# Altium PCB PCB1.PcbDoc
Units mil, origin at the board's own origin, x right, y up, seen from the top; angles counter-clockwise.
Board outline 2830.13 x 2330.03 mil, 2 copper layers (Top Layer, Bottom Layer); 108 components, 87 nets, 373 pads, 131 vias.
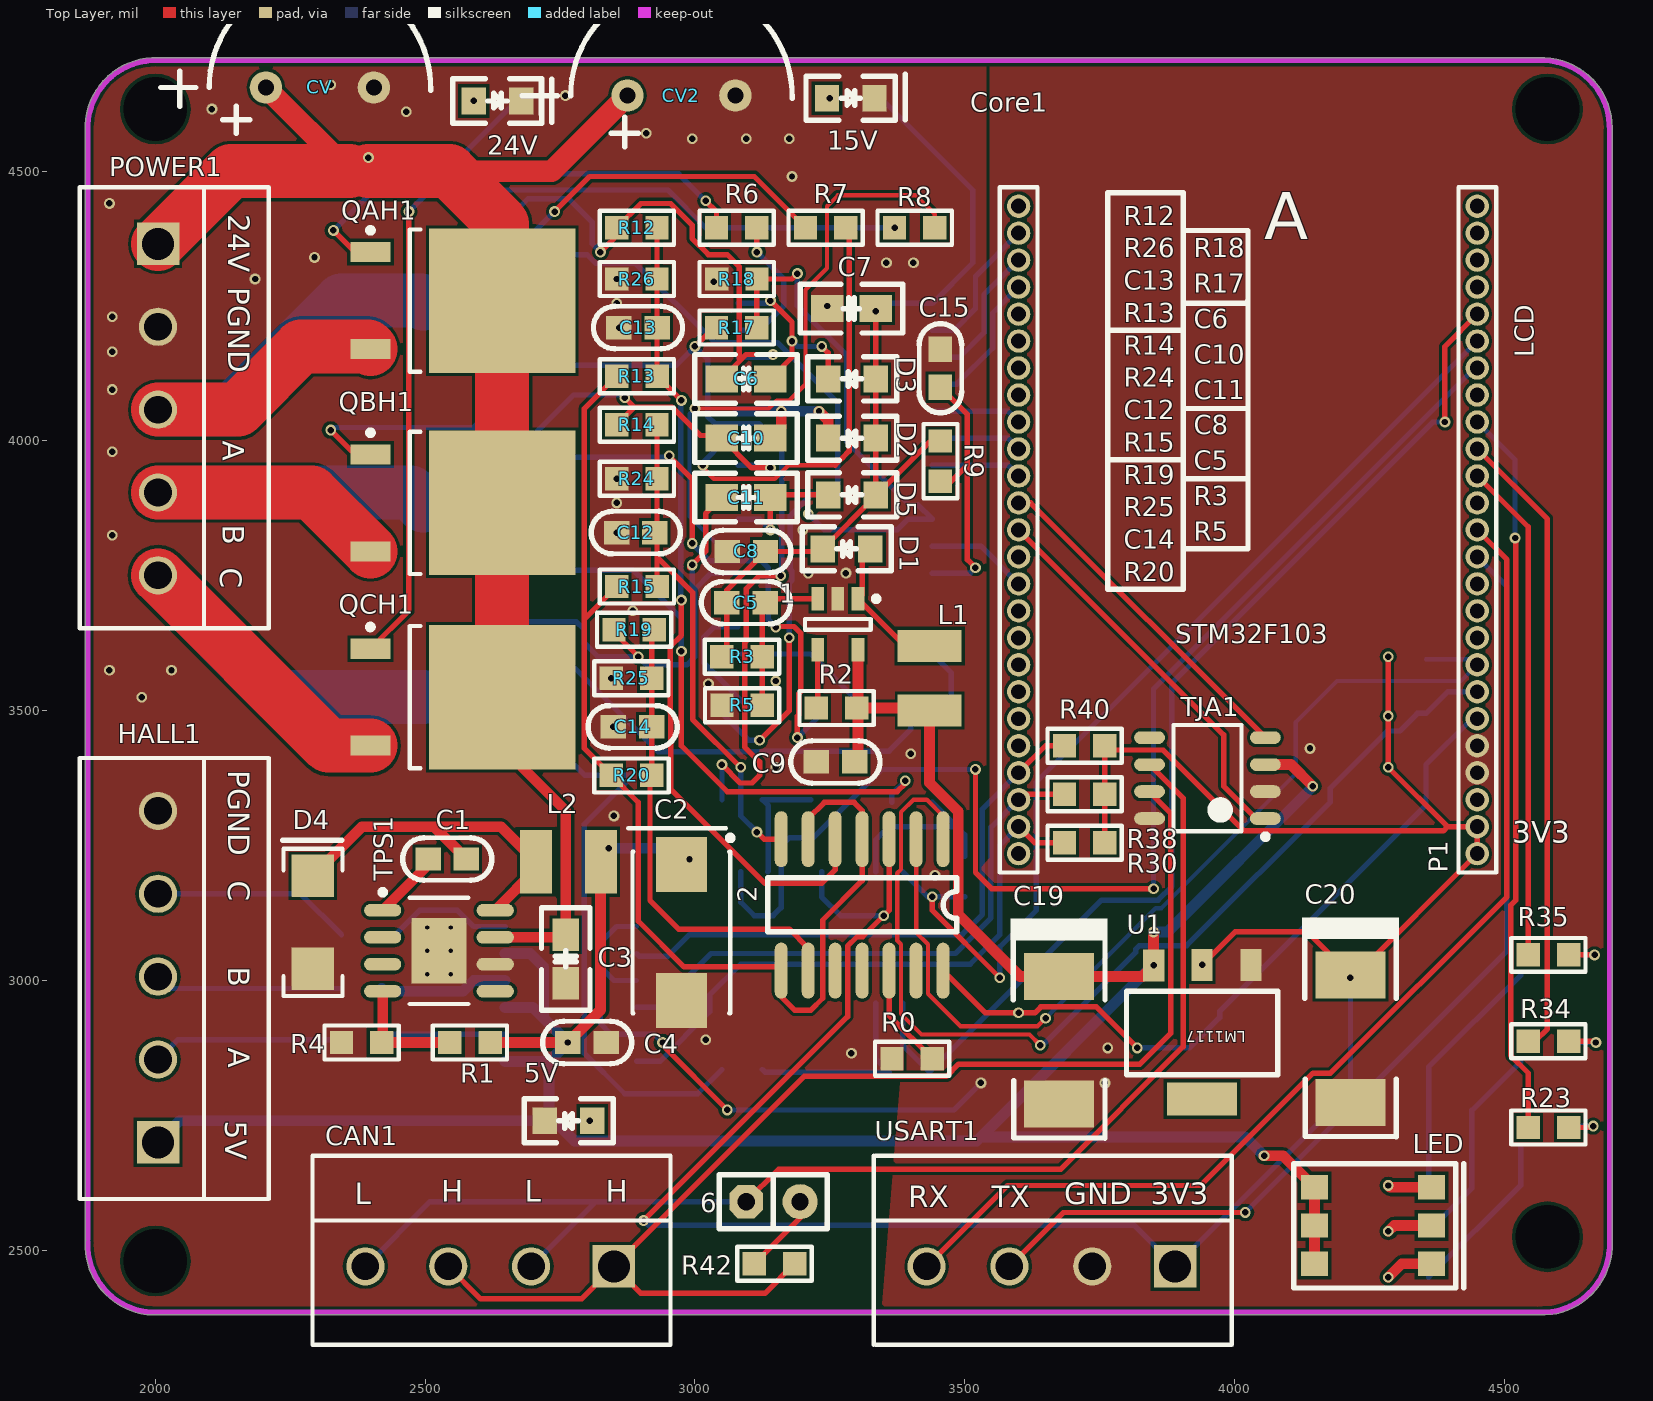
[diagram p0: Top Layer view]
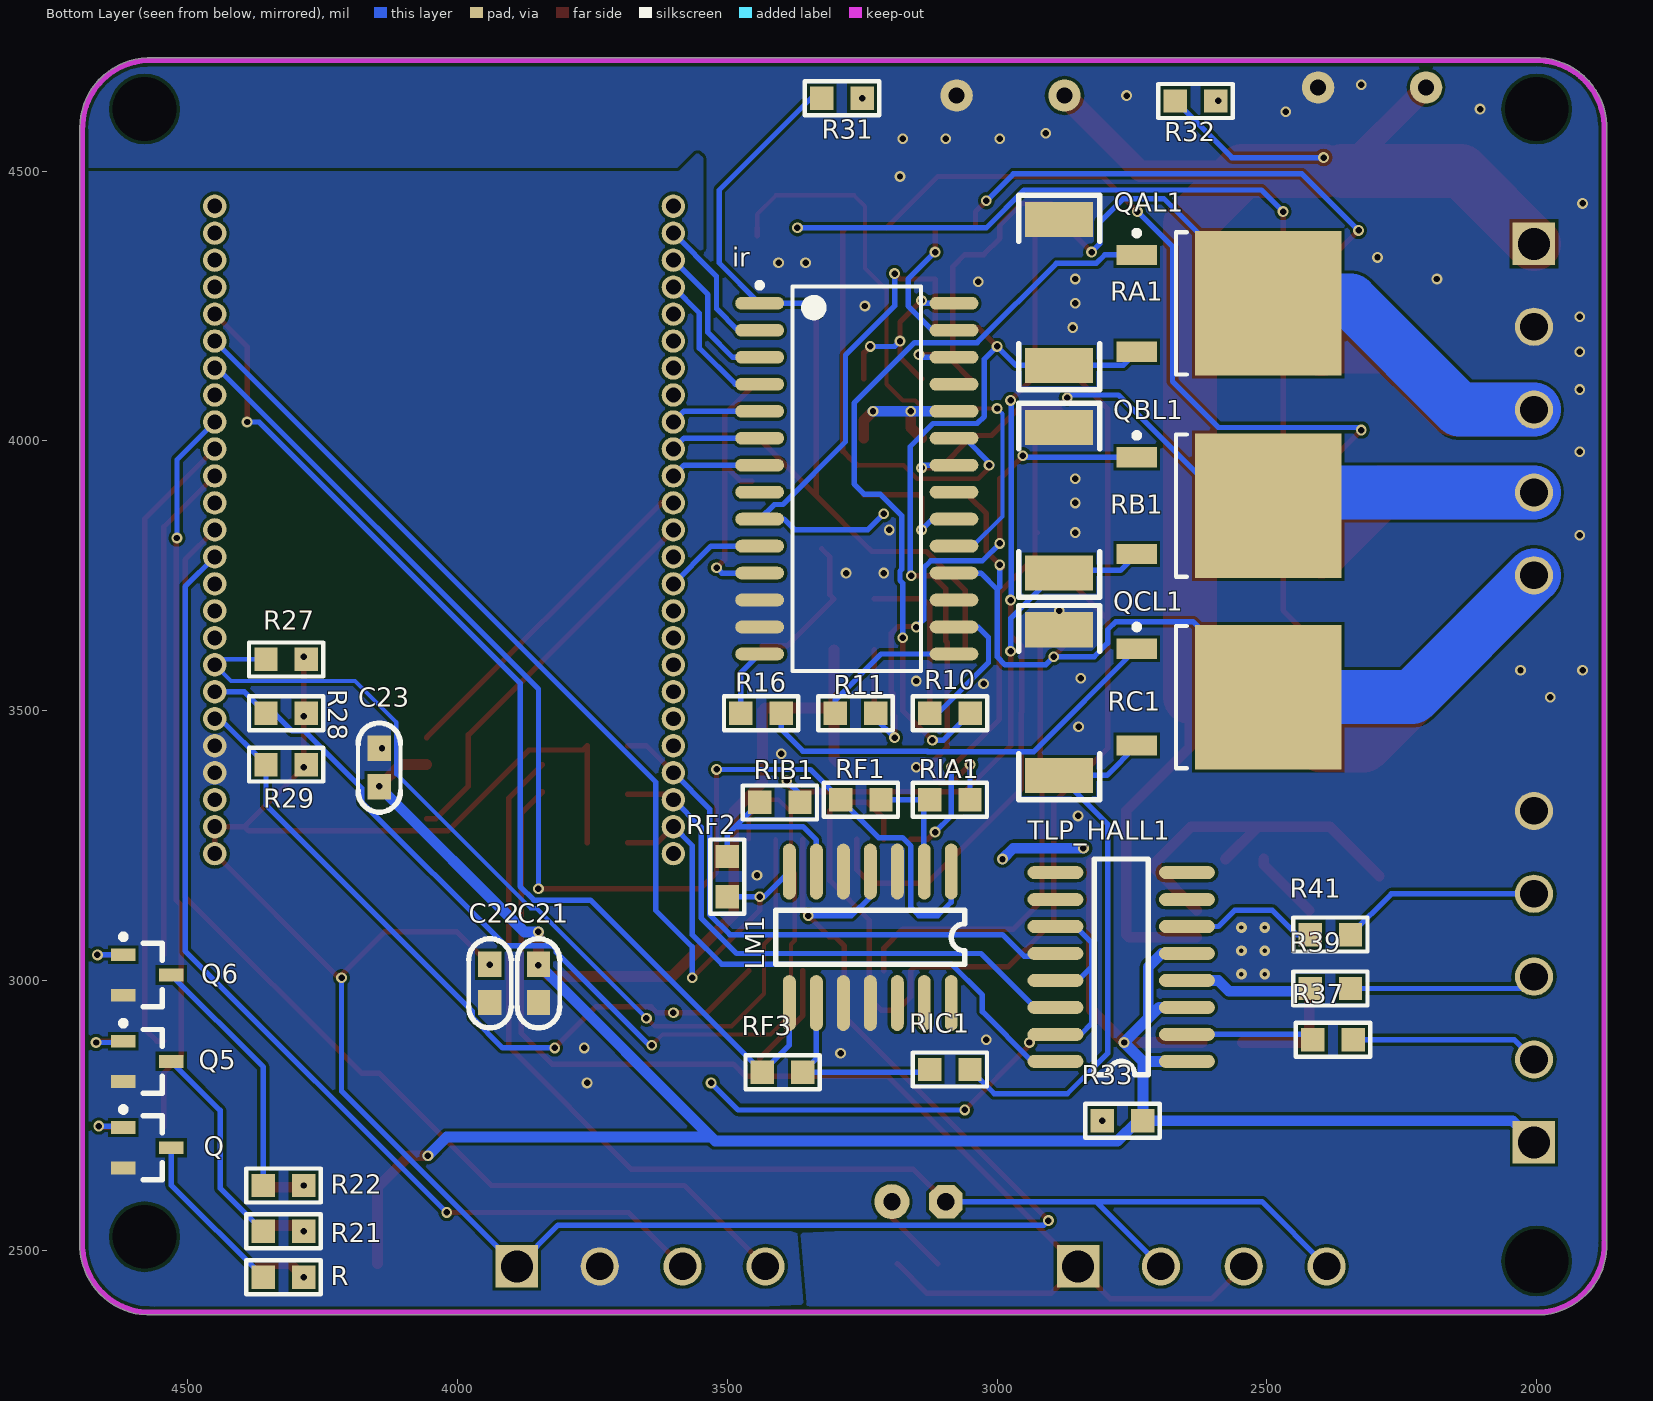
[diagram p1: Bottom Layer view, seen from below]

## Layer stack, top to bottom
Top Layer: signal copper 1.4
Dielectric: dielectric 12.6, FR-4, Dk 4.8
Bottom Layer: signal copper 1.4

## Board outline
1994.8,2379.99 cw(c2000,2510) 1869.99,2515.2 cw(c1875,2515) 1870.65,2517.5 cw(c1875,2520) 1869.98,2520 1869.98,4585 cw(c1875,4585) 1869.99,4585.2 cw(c2000,4580) 2005.1,4710.02 4575,4710.02 cw(c4575,4705) 4575.2,4710.01 cw(c4570,4580) 4700.11,4580 cw(c4570,4580) 4700.02,4574.9 4700.02,2505 cw(c4695,2505) 4700.01,2504.8 cw(c4570,2510) 4564.8,2379.99 cw(c4565,2385) 4562.5,2380.65 cw(c4560,2385) 4560,2379.99 1995,2379.99 cw(c1995,2385)

## Design rules (kind name [scope] priority, off if disabled: settings)
Clearance [All] p1: gap=6
PolygonConnect [All] p1: connectstyle=Direct reliefconductorwidth=10 reliefentries=4 polygonreliefangle="90 Angle" airgapwidth=10
RoutingVias [All] p1: holewidth=28 width=50 viastyle="Through Hole" minholewidth=28 minwidth=50 maxholewidth=28 maxwidth=50
SolderMaskExpansion [All] p1: expansion=4
Width [All] p1: maxlimit=100 minlimit=8 preferedwidth=10 minimp=50.000000 maximp=50.000000 favimp=50.000000
28 further rules are at their usual default settings.

## Components (designator, comment, footprint, x,y, rotation, side; value= is the part's Value field where it differs from the comment)
1 "LM27313" LM27313 3265,3660 r270 top
2 "LM339" SOP14 3460,3250 r270 top
5V "lED" 0805D 2810,2740 r180 top
6 "Header 2" SIP2 3195,2590 r180 top
15V "lED" 0805D 3245,4635 r0 top (schematic designator 12V)
24V "lED" 0805D 2590,4630 r0 top
C1 "Cap" CAP-MLCC-0603 2505.67,3225 r180 top
C2 "Cap Pol1" CAP-TAN-7343/CAPD 2975,3215 r270 top
C3 "Cap" 0805C 2760.67,3085 r270 top
C4 "Cap" CAP-MLCC-0603 2835.67,2885 r0 top
C5 "Cap" CAP-MLCC-0603 3130,3700 r0 top
C6 "Cap" 0805C 3050,4115 r0 top
C7 "Cap" 0805C 3245,4245 r0 top
C8 "Cap" CAP-MLCC-0603 3060,3795 r180 top
C9 "Cap" CAP-MLCC-0603 3225,3405 r180 top
C10 "Cap" 0805C 3050,4005 r0 top
C11 "Cap" 0805C 3050,3895 r0 top
C12 "Cap" CAP-MLCC-0603 2855,3830 r180 top
C13 "Cap" CAP-MLCC-0603 2930,4210 r0 top
C14 "Cap" CAP-MLCC-0603 2920,3470 r0 top
C15 "Cap" CAP-MLCC-0603 3455,4170 r90 top
C19 "Cap Pol" 6032C 3675,3007.28 r90 top
C20 "Cap Pol" 6032C 4215,3010 r90 top
C21 "Cap" CAP-MLCC-0603 3850,3030 r90 bottom
C22 "Cap" CAP-MLCC-0603 3940,3030 r90 bottom
C23 "Cap" CAP-MLCC-0603 4145,3430 r90 bottom
CAN1 "Header 4" Green_4P 2775,2375 r180 top
Core1 "STM32F103 SMALL" STM32F103Small 4050,3820 r90 top
CV "680uF" C_ELE 2205,4655 r0 top
CV2 "680uF" C_ELE 2875,4640 r0 top
D1 "1N5819" 0805D 3325,3800 r180 top
D2 "Diode" 0805D 3335,4005 r180 top
D3 "Diode" 0805D 3335,4115 r180 top
D4 "Diode" SS34 2295.67,3105 r270 top
D5 "Diode" 0805D 3335,3900 r180 top
HALL1 "Header 5" Green_5P#1 1910,2775 r90 top
ir "IR2136s" ir2136s 3260,3930 r180 bottom
L1 "Inductor" CD52 3435,3550 r180 top
L2 "Inductor" CD52 2755.67,3220 r90 top
LED "5050 LED" 5050LED 4365,2475 r90 top
LM1 "LM324" SOP14 3085,3190 r270 bottom
POWER1 "Header 5" Green_5P#2 1910,4290 r270 top
Q "8050" SOT-23B_N 4575,2690 r180 bottom
Q5 "8050" SOT-23B_N 4575,2850 r180 bottom
Q6 "8050" SOT-23B_N 4575,3010 r180 bottom
QAH1 "LR7843" LR7843 2570,4260 r0 top
QAL1 "LR7843" LR7843 2570,4255 r180 bottom
QBH1 "LR7843" LR7843 2570,3885 r0 top
QBL1 "LR7843" LR7843 2570,3880 r180 bottom
QCH1 "LR7843" LR7843 2570,3525 r0 top
QCL1 "LR7843" LR7843 2570,3525 r180 bottom
R "Res1" RES-0603 4360,2450 r0 bottom
R0 "Res1" RES-0603 3440,2855 r0 top
R1 "Res1" RES-0603 2545.67,2885 r180 top
R2 "Res1" RES-0603 3300,3505 r0 top
R3 "Res1" RES-0603 3050,3600 r180 top
R4 "Res1" RES-0603 2345,2885 r180 top
R5 "Res1" RES-0603 3125,3510 r0 top
R6 "Res1" RES-0603 3040,4395 r180 top
R7 "Res1" RES-0603 3205,4395 r180 top
R8 "Res1" RES-0603 3370,4395 r180 top
R9 "Res1" RES-0603 3455,3925 r270 top
R10 "Res1" RES-0603 3050,3495 r180 bottom
R11 "Res1" RES-0603 3225,3495 r180 bottom
R12 "Res1" RES-0603 2855,4395 r180 top
R13 "Res1" RES-0603 2930,4120 r0 top
R14 "Res1" RES-0603 2855,4030 r180 top
R15 "Res1" RES-0603 2930,3730 r0 top
R16 "Res1" RES-0603 3400,3495 r180 bottom
R17 "Res1" RES-0603 3040,4210 r180 top
R18 "Res1" RES-0603 3115,4300 r0 top
R19 "Res1" RES-0603 2850,3650 r180 top
R20 "Res1" RES-0603 2920,3380 r0 top
R21 "Res1" RES-0603 4360,2535 r0 bottom
R22 "Res1" RES-0603 4360,2620 r0 bottom
R23 "Res1" RES-0603 4619.29,2727.4 r0 top
R24 "Res1" RES-0603 2855,3930 r180 top
R25 "Res1" RES-0603 2845,3560 r180 top
R26 "Res1" RES-0603 2855,4300 r180 top
R27 "Res1" RES-0603 4355,3595 r0 bottom
R28 "Res1" RES-0603 4355,3495 r0 bottom
R29 "Res1" RES-0603 4355,3400 r0 bottom
R30 "Res1" RES-0603 3685,3255 r180 top
R31 "Res1" RES-0603 3250,4635 r180 bottom
R32 "Res1" RES-0603 2595,4630 r180 bottom
R33 "Res1" RES-0603 2805,2740 r0 bottom
R34 "Res1" RES-0603 4619.29,2887.4 r0 top
R35 "Res1" RES-0603 4619.29,3047.4 r0 top
R37 "Res1" RES-0603 2340,2890 r180 bottom
R38 "Res1" RES-0603 3685,3345 r180 top
R39 "Res1" RES-0603 2345,2985 r180 bottom
R40 "Res1" RES-0603 3685,3435 r180 top
R41 "Res1" RES-0603 2345,3085 r180 bottom
R42 "Res1" RES-0603 3185,2475 r0 top
RA1 "Res1" 2512R 2890,4360 r270 bottom
RB1 "Res1" 2512R 2890,3975 r270 bottom
RC1 "Res1" 2512R 2890,3600 r270 bottom
RF1 "Res1" RES-0603 3290,3335 r0 bottom
RF2 "Res1" RES-0603 3500,3155 r270 bottom
RF3 "Res1" RES-0603 3435,2830 r0 bottom
RIA1 "Res1" RES-0603 3125,3335 r0 bottom
RIB1 "Res1" RES-0603 3440,3330 r0 bottom
RIC1 "Res1" RES-0603 3125,2835 r0 bottom
TJA1 "TJA1050" TJA1050 3950,3375 r180 top
TLP_HALL1 "TLP281-4" SOP16 2660,2850 r0 bottom
TPS1 "TPS5430" TPS5430 2525.67,3055 r0 top
U1 "tlv1117-3.3" LM1117 3950,2905 r180 top
USART1 "Header 4" Green_4P 3815,2375 r180 top

## Footprints (in the part's own frame and the unit in brackets; to place one, negate y for a bottom-side part, rotate by r counter-clockwise, add the part's x,y. Pads: shape width x height; smd on the part's side, far side on the other; paste and mask are expansions set on the pad)
0805C [mil]
  rect 60x50 smd: 1(0,0) 2(90,0)
  silkscreen extent -50,-45 140,45
0805D [mil]
  rect 45x50 smd: A(0,0) K(88,0)
  silkscreen extent -39,-41 126,41
2512R [mm]
  rect 1.65x3.2 smd: 1(-1.27,0.127) 2(5.588,0.127)
  silkscreen extent -2.41,-1.78 6.73,2.03
5050LED [mm]
  rect 1.143x1.27 smd: A1(0,5.5) A2(1.8,5.5) A3(3.6,5.5) K1(0,0) K2(1.8,0) K3(3.6,0)
  silkscreen extent -1.14,-1.52 4.7,6.48
6032C [mm]
  rect 2.2x3.3 smd: 1(0,0) 2(-6,0)
  silkscreen extent -7.6,-2.29 2.72,2.28
C_ELE [mil]
  round 60 hole 30: 1(0,0) 2(200,0)
  silkscreen extent -195,-35 305,205
CAP-MLCC-0603 [mm]
  rect 1.2x1.1 smd: 1(0,0) 2(-1.8,0)
  silkscreen extent -3,-1 1.2,1, body extent -1.77,-0.47 -0.02,0.48, height 0.85
CAP-TAN-7343/CAPD [mm]
  rect 2.6x2.4 smd: 1(0,0) 2(6.4,0)
  silkscreen extent -1.7,-2.5 7,2.43
CD52 [mm]
  rect 3x1.5 smd: 1(0,1.27) 2(0,-1.778)
Green_4P [mm]
  rect 2x2 hole 1.5: 1(-1.905,-2.413)
  round 1.8 hole 1.3: 2(1.995,-2.413) 3(5.895,-2.413) 4(9.795,-2.413)
  silkscreen extent -4.57,-7.62 12.28,1.27
Green_5P#1 [mm]
  rect 2x2 hole 1.5: 1(-1.905,-2.413)
  round 1.8 hole 1.3: 2(1.995,-2.413) 3(5.895,-2.413) 4(9.795,-2.413) 5(13.695,-2.413)
  silkscreen extent -4.57,-7.62 16.18,1.27
Green_5P#2 [mm]
  rect 2x2 hole 1.5: 1(-1.905,2.413)
  round 1.8 hole 1.3: 2(1.995,2.413) 3(5.895,2.413) 4(9.795,2.413) 5(13.695,2.413)
  silkscreen extent -4.57,-1.27 16.18,7.62
ir2136s [mm]
  oval 2.3x0.6 smd: 1(-4.575,8.255) 2(-4.575,6.985) 3(-4.575,5.715) 4(-4.575,4.445) 5(-4.575,3.175) 6(-4.575,1.905) 7(-4.575,0.635) 8(-4.575,-0.635) 9(-4.575,-1.905) 10(-4.575,-3.175) 11(-4.575,-4.445) 12(-4.575,-5.715) 13(-4.575,-6.985) 14(-4.575,-8.255) 15(4.575,-8.255) 16(4.575,-6.985) 17(4.575,-5.715) 18(4.575,-4.445) 19(4.575,-3.175) 20(4.575,-1.905) 21(4.575,-0.635) 22(4.575,0.635) 23(4.575,1.905) 24(4.575,3.175) 25(4.575,4.445) 26(4.575,5.715) 27(4.575,6.985) 28(4.575,8.255)
  silkscreen extent -4.7,-9.05 3.03,9.23, body extent -3.8,-9.05 3.8,9.05, height 1.7
LM1117 [mm]
  rect 1x1.5 smd: 1(-2.043,-3.148) 2(0.256,-3.148) 3(2.53,-3.123)
  rect 3.3x1.549 smd: 4(0.254,3.175)
  silkscreen extent -3.3,-1.91 3.81,2.03
LM27313 [mm] "SOT23, 5-Leads, Body 2.90x2.80mm, Pitch 0.95mm, IPC Medium Density"
  rect 1.1x0.6 smd: 1(-1.2,0.95) 2(-1.2,0) 3(-1.2,-0.95) 4(1.2,-0.95) 5(1.2,0.95)
  silkscreen extent -1.32,-1.55 0.25,1.93, body extent -0.87,-1.52 0.87,1.53, height 1.45
LR7843 [mm] "D-PAK, 3-Pads, Body 6.20x6.72mm (max), IPC Medium Density"
  rect 6.9x6.8 smd: D(1.85,0)
  rect 1.9x0.95 smd: G(-4.35,2.28) S(-4.35,-2.28)
  silkscreen extent -4.47,-3.35 -2,3.43, body extent -2.5,-3.35 3.7,3.35, height 2.38
RES-0603 [mm]
  rect 1.1x1.1 smd: 1(0,0) 2(-1.9,0)
  silkscreen extent -2.7,-0.8 0.8,0.8, body extent -1.8,-0.47 -0.1,0.48, height 0.6
SIP2 [mil]
  round 65 hole 32: 1(0,0)
  oct 62x62 hole 32: 2(100,0)
  silkscreen extent -50,-50 150,50
SOP14 [mil]
  oval 103.62x24 smd: 1(-11.81,0) 2(-11.81,-50) 3(-11.81,-100) 4(-11.81,-150) 5(-11.81,-200) 6(-11.81,-250) 7(-11.81,-300) 8(231.81,-300) 9(231.81,-250) 10(231.81,-200) 11(231.81,-150) 12(231.81,-100) 13(231.81,-50) 14(231.81,0)
  silkscreen extent 60,-325 160,25
SOP16 [mil]
  oval 103.62x24 smd: 1(-11.81,0) 2(-11.81,-50) 3(-11.81,-100) 4(-11.81,-150) 5(-11.81,-200) 6(-11.81,-250) 7(-11.81,-300) 8(-11.81,-350) 9(231.81,-350) 10(231.81,-300) 11(231.81,-250) 12(231.81,-200) 13(231.81,-150) 14(231.81,-100) 15(231.81,-50) 16(231.81,0)
  silkscreen extent 60,-375 160,25
SOT-23B_N [mm] "SOT23, 3-Leads, Body 2.9x1.3mm, Pitch 0.95mm, Lead Span 2.4mm, IPC Medium Density"
  rect 1.15x0.6 smd: 1(-1.125,0.95) 2(-1.125,-0.95) 3(1.125,0)
  silkscreen extent -1.25,-1.5 0.7,1.92, body extent -0.7,-1.5 0.7,1.5, height 1.14
SS34 [mm]
  rect 2x2 smd: A(2.125,-0.102) K(-2.25,-0.102)
  silkscreen extent -3.94,-1.52 3.4,1.3, body extent -2.48,-1.48 2.37,1.3, height 1.4
STM32F103Small [mm]
  round 1.1 hole 0.7: 1(-14.859,-10.16) 2(-13.589,-10.16) 3(-12.319,-10.16) 4(-11.049,-10.16) 5(-9.779,-10.16) 6(-8.509,-10.16) 7(-7.239,-10.16) 8(-5.969,-10.16) 9(-4.699,-10.16) 10(-3.429,-10.16) 11(-2.159,-10.16) 12(-0.889,-10.16) 13(0.381,-10.16) 14(1.651,-10.16) 15(2.921,-10.16) 16(4.191,-10.16) 17(5.461,-10.16) 18(6.731,-10.16) 19(8.001,-10.16) 20(9.271,-10.16) 21(10.541,-10.16) 22(11.811,-10.16) 23(13.081,-10.16) 24(14.351,-10.16) 25(15.621,-10.16) 26(-14.859,11.43) 27(-13.589,11.43) 28(-12.319,11.43) 29(-11.049,11.43) 30(-9.779,11.43) 31(-8.509,11.43) 32(-7.239,11.43) 33(-5.969,11.43) 34(-4.699,11.43) 35(-3.429,11.43) 36(-2.159,11.43) 37(-0.889,11.43) 38(0.381,11.43) 39(1.651,11.43) 40(2.921,11.43) 41(4.191,11.43) 42(5.461,11.43) 43(6.731,11.43) 44(8.001,11.43) 45(9.271,11.43) 46(10.541,11.43) 47(11.811,11.43) 48(13.081,11.43) 49(14.351,11.43) 50(15.621,11.43)
  silkscreen extent -15.75,-11.05 16.51,12.32
TJA1050 [mm] "SOIC, 8-Leads, Body 4.90x3.90mm, Pitch 1.27mm, IPC Medium Density"
  oval 1.45x0.6 smd: 1(-2.725,1.905) 2(-2.725,0.635) 3(-2.725,-0.635) 4(-2.725,-1.905) 5(2.725,-1.905) 6(2.725,-0.635) 7(2.725,0.635) 8(2.725,1.905)
  silkscreen extent -2.85,-2.5 1.6,2.88, body extent -2,-2.5 2,2.5, height 1.75
TPS5430 [mm]
  oval 1.75x0.6 smd: 1(-2.65,1.905) 2(-2.65,0.635) 3(-2.65,-0.635) 4(-2.65,-1.905) 5(2.65,-1.905) 6(2.65,-0.635) 7(2.65,0.635) 8(2.65,1.905)
  rect 2.6x3.1 smd: 9(0,0)
  silkscreen extent -2.77,-2.5 1.38,2.88, body extent -2,-2.5 2,2.5, height 1.7

## Part data
5V 15V 24V: library part 00-D-LED, "LED"
6: "Header, 2-Pin"
C1 C3 C4 C6 C7 C10 C11 C12 C13 C14 C15 C21 C22 C23: "Capacitor"
C2 C19 C20: "Polarized Capacitor (Radial)"
C5 C8 C9: library part Cap_1, "Capacitor"
CAN1 USART1: "Header, 4-Pin"
CV CV2: library part CAP-ELE, "电解电容"
D1: library part D-MBRA140T3, "MBRA140T3"
HALL1 POWER1: "Header, 5-Pin"
Q Q5 Q6: library part QNPN, "NPN Bipolar Transistor"
R R0 R1 R4 R6 R7 R8 R9 R10 R11 R12 R13 R14 R15 R16 R17 R18 R19 R20 R21 R22 R23 R24 R25 R26 R27 R28 R29 R30 R31 R32 R33 R34 R35 R37 R38 R39 R40 R41 R42 RA1 RB1 RC1 RF1 RF2 RF3 RIA1 RIB1 RIC1: "Resistor"
R2 R3 R5: library part Res1_1, "Resistor"
TJA1: "CAN总线收发器"
TLP_HALL1: library part IC-TLP281-4
U1: library part LM1117IMP-5.0, "800mA Low-Dropout Linear Regulator"

## Free pads (board coordinates)
  round 30 hole 118.11: 0(2000,2480) 0(2000,4615) 0(4580,2525) 0(4580,4615)

## Via types
v1: diameter 20, hole 12, Top Layer to Bottom Layer, 125 vias
v2: diameter 20, hole 7.87, Top Layer to Bottom Layer, 6 vias

## Nets (pads, with @x,y where several pads share a name; then routed paths per layer and width w, separated by ;. In a path a pad name is that pad's centre, name@x,y a point inside that pad or via, vN(x,y) a via of type N, cw(c..) or ccw(c..) an arc to the next point about the centre after c; other vN are vias at no path point)
3.3V: 2.3 C20.1 C22.1 Core1.1 Core1.2 LM1.4 R27.2 R28.2 R29.2 R30.2 R38.2 R40.2 U1.2 USART1.1 | length 4778.6
  Top Layer w10: v1(2905,2555) 3283,2933 3283,3063.53 3300.47,3081 3311,3081 v1(3350,3120) 3360,3130 2.3 ; R30.2 R38.2 R40.2 3767.61,3427.19 3867.81,3427.19 4017.81,3277.19 4387.19,3277.19 4395,3285 ; v1(3939.92,3028.95) 4000.97,3090 4135,3090 C20.1 4225,3010 Core1.1 Core1.2 4395,3285 ; v1(4285,3600) v1(4285,3395) 4395,3285
  Bottom Layer w10: v1(2905,2555) 2913.5,2546.5 3813.5,2546.5 USART1.1 4215,2795 v1(4215,3005) ; LM1.4 3235,3155 3270,3120 v1(3350,3120)
  other v1: 4285,3490
5V: 1.5 C2.1 C4.2 C9.2 C19.1 C21.1 C23.2 HALL1.1 L1.1 L2.2 LED.A1 LED.A2 LED.A3 R1.2 R2.1 R33.2 TJA1.3 TLP_HALL1.1 TLP_HALL1.3 TLP_HALL1.5 U1.3 | length 5774.2
  Top Layer w20: R1.2 v1(2764.8,2885) 2765,2885 2825,2945 2825,3219.33 L2.2 ; C9.2 3302.4,3411.54 R2.1@3302.4,3505 ; R2.1 R2.1@3302.4,3505 ; 1.5 R2.1@3302.4,3505 ; v1(3850,3090) 3850,3028.34 v1(3850.38,3027.97) 3829.68,3007.28 C19.1 3602.72,3007.28 3488,3122 3488,3313.22 3435,3366.22 L1.1 3430,3505 R2.1@3302.4,3505 ; v1(4055,2675) 4090.2,2675 LED.A3 LED.A2 LED.A1 ; TJA1.3 4105,3400 v1(4145,3360)
  Bottom Layer w20: HALL1.1 2045,2740 R33.2 ; TLP_HALL1.1 2729.8,2850 ; TLP_HALL1.3 2699.8,2950 2717.4,2932.4 ; TLP_HALL1.5 2695,3050 2720,3025 2720,2935 2717.4,2932.4 ; v1(2840,3245) 2970,3245 v1(2990,3225) ; C21.1 3530,2710 ; v1(3850,3090) 3875.87,3090 C23.2 ; v1(4055,2675) 4020,2710 3530,2710 ; 2717.4,2932.4 v1(2764.8,2885) 2729.8,2850 ; 2729.8,2850 2729.8,2740.39 R33.2 ; R33.2 2739.07,2740 2776.72,2702.35 3522.35,2702.35 3530,2710
15V: C5.2 C7.2 C8.2 D1.K D2.A D3.A D5.A ir.1 R3.1 R9.2 R31.2 | length 1597.4
  Top Layer w10: R3.1 3059.13,3609.13 C5.2 3059.13,3723.27 C8.2 3232,3795 D1.K D5.A@3335,3898 ; C7.2 D3.A D2.A D5.A D5.A@3335,3898 ; R9.2 3436.8,3999.8 D5.A@3335,3898
  Bottom Layer w10: R31.2 3345,4635 3515,4465 3515,4329.88 ir.1 3350,4255 v1(3335,4240)
24V: C3.1 CV2.1 CV.1 POWER1.1 QAH1.D QBH1.D QCH1.D R32.2 TPS1.7 | length 3163.7
  Top Layer w20: TPS1.7 2755.67,3080 C3.1 2760.67,3314.33 2642.83,3432.17 QCH1.D
  Top Layer w40: CV.1 2360,4500 2395,4500 ; 2545,4500 2735,4500 CV2.1
  Top Layer w100: POWER1.1 2140,4500 2360,4500 ; 2395,4500 2545,4500 2642.83,4402.17 QAH1.D QBH1.D QCH1.D
  Bottom Layer w10: v1(2395,4525) 2564.8,4525 R32.2 R32.2@2669.8,4624.8
AH: ir.27 R6.2 | length 269.5
  Top Layer w10: R6.2 3115,4394.8 v1(3115,4350)
  Bottom Layer w10: ir.27 3120,4205 3165,4250 3165,4300 v1(3115,4350)
AHIN: Core1.49 ir.2 | length 269.6
  Bottom Layer w10: ir.2 3480,4205 3520,4245 3520,4305 Core1.49
AL: ir.16 R10.2 | length 266.5
  Bottom Layer w10: ir.16 3035,3655 3016,3636 3016,3589 3110,3495 R10.2
ALIN: Core1.42 ir.5 | length 168.2
  Bottom Layer w10: ir.5 3580,4055 Core1.42
BH: ir.23 R7.2 | length 824.7
  Top Layer w8: v1(3015,3955) 3010,3955 3035,3930 3148.28,3930 3173.28,3955 3260,3955
  Top Layer w10: 3260,3955 3274,3969 3274.06,3969 3286,3980.94 3286,4388.8 R7.2
  Bottom Layer w10: v1(3015,3955) 3010,3955 3060,4005 ir.23
BHIN: Core1.48 ir.3 | length 275.4
  Bottom Layer w10: ir.3 3490,4155 3536,4201 3536,4271 Core1.48
BL: ir.15 R11.2 | length 280.2
  Bottom Layer w10: ir.15 3215,3605 3299.8,3520.2 R11.2
BLDCA: C6.1 ir.26 POWER1.3 QAH1.S QAL1.D R12.1 | length 2216
  Top Layer w10: v1(2825,4350) 2855,4380 R12.1 2900,4440 2955,4440 2995,4400 2995,4375 3025,4345 3060,4345 3082.15,4322.85 3082.15,4152.85 3085,4150 ; C6.1 3085,4150 ; v1(3145,4160) 3095,4160 3085,4150
  Top Layer w100: POWER1.3 2152.91,4057.91 2270,4175 2393.98,4175 QAH1.S
  Bottom Layer w10: QAL1.D 2691.17,4449 2766,4449 2810,4405 2810,4365 v1(2825,4350) ; ir.26 3140,4155 v1(3145,4160)
  Bottom Layer w100: POWER1.3 2142.91,4057.91 2345,4260 2492.17,4260 QAL1.D
BLDCB: C10.1 ir.22 POWER1.4 QBH1.S QBL1.D R14.1 | length 1833.2
  Top Layer w10: R14.1 2887.65,4062.65 ; v1(2870,4080) 2887.35,4062.65 2887.65,4062.65 ; v1(3140,3950) 3105,3950 C10.1 3045,4010 3010,4010 2957.35,4062.65 2887.65,4062.65
  Top Layer w100: POWER1.4 2289.61,3904.37 QBH1.S
  Bottom Layer w10: QBL1.D 2570,3880 2775,4085 2865,4085 v1(2870,4080) ; ir.22 3135,3955 v1(3140,3950)
  Bottom Layer w100: POWER1.4 2472.8,3904.37 QBL1.D
BLDCC: C11.1 ir.18 POWER1.5 QCH1.S QCL1.D R19.1 | length 2219.9
  Top Layer w10: R19.1@2845,3650 v1(2895,3600) v1@2900,3600 ; v1@2990,3765 v1(2995,3770) 3020,3795 3020,3865 C11.1
  Top Layer w100: POWER1.5 2320.59,3435.24 QCH1.S
  Bottom Layer w10: QCL1.D 2637.17,3665 2780,3665 2795,3650 2795,3625 2820,3600 v1(2895,3600) 2910,3585 2985,3585 3000,3600 3000,3725 ; v1(2995,3770) 2995,3730 3000,3725 ; ir.18 3030,3755 3000,3725
  Bottom Layer w100: POWER1.5 2230.83,3525 QCL1.D
BLIN: Core1.41 ir.6 | length 168.2
  Bottom Layer w10: ir.6 3580,4005 Core1.41
CAN_H: CAN1.1 CAN1.3 R42.1 TJA1.7 | length 2410.7
  Top Layer w10: CAN1.3 2602.91,2410 2790,2410 CAN1.1 ; R42.1 3130,2420 2900,2420 CAN1.1 ; TJA1.7 3842.72,3348.99 3882.26,3309.45 3882.26,2902.26 3825,2845 3488.86,2845 3466.21,2822.35 3202.35,2822.35 CAN1.1
CAN_L: 6.2 CAN1.2 CAN1.4 TJA1.6 | length 2402.6
  Top Layer w10: 6.2 3155,2650 3677.77,2650 3905,2877.23 3905,3337.72 TJA1.6
  Bottom Layer w10: CAN1.4 2509.37,2590 2816.46,2590 ; CAN1.2 2816.46,2590 ; 6.2 2816.46,2590
CAN_RX: Core1.39 TJA1.4 | length 637.5
  Top Layer w10: Core1.39 3622.28,3885 TJA1.4
CAN_TX: Core1.38 TJA1.1 | length 734.5
  Top Layer w10: Core1.38 3980,3455 3980,3360 4040,3300 TJA1.1
CH: ir.19 R8.2 | length 1149.9
  Top Layer w8: v1(3000,4060) 3136.72,4060 3151.72,4075 3175,4075 3205,4105 3205,4280 3245,4320 3245,4435 3265,4455 3410,4455 3444.8,4420.2 R8.2
  Top Layer w10: R8.2@3444.8,4379.8 R8.2
  Bottom Layer w8: v1(3000,4060) 2990,4050 2990,3860 3045,3805 ir.19
CHANGEA: 2.2 Core1.8 R27.1 | length 1771.5
  Top Layer w8: 2.2 3410,3089.11 3432,3067.11 3432,2975.27 3492.27,2915 3635,2915 v1(3650,2930)
  Bottom Layer w8: v1(3650,2930) 3854,3134 3864.91,3134 4113.35,3382.43 4113.35,3478.35 4190,3555 4420,3555 Core1.8 4440,3595 R27.1
CHANGEB: 2.1 Core1.7 R28.1 | length 1899.6
  Top Layer w8: 2.1 3460,3305 3430,3335 3405,3335 3382,3312 3382,3205.89 3375,3198.89 3375,3074.11 3382,3067.11 3382,2938 3420,2900 3620,2900 v1(3640,2880)
  Bottom Layer w10: v1@3645,2880 3817.35,3052.35 3817.35,3058.18 3823.79,3064.62 3911.32,3064.62 4177.65,3330.96 4177.65,3356.32 4283.68,3462.35 4306.41,3462.35 4339.06,3495 R28.1 4395,3535 Core1.7
CHANGEC: 2.14 Core1.6 R29.1 | length 1361.9
  Top Layer w10: 2.14 3538.19,2940 v1(3600,2940) 3630.3,2940 3641.3,2951 3744,2951 v1(3820,2875)
  Bottom Layer w10: v1(3820,2875) 3916.7,2875 3972.65,2930.96 3972.65,2942.65 4355,3325 R29.1 4440,3485 Core1.6
CHIN: Core1.47 ir.4 | length 272.5
  Bottom Layer w10: ir.4 3485,4105 3552,4172 3552,4237 Core1.47
CL: ir.14 R16.2 | length 124.4
  Bottom Layer w10: ir.14 3474.8,3570.32 R16.2
CLIN: Core1.40 ir.7 | length 168.2
  Bottom Layer w10: ir.7 3580,3955 Core1.40
EN: Core1.36 ir.10 | length 188.9
  Bottom Layer w10: ir.10 3530,3805 Core1.36
FAULT: ir.8
GND: 2.12 C19.2 C20.2 C21.2 C22.2 C23.1 Core1.4 Core1.5 Q5.2 Q6.2 Q.2 R0.1 TJA1.2 TJA1.8 TLP_HALL1.11 TLP_HALL1.13 TLP_HALL1.15 U1.1 USART1.2 | length 1297.6
  Top Layer w10: v1(2940,2885) 2940,2880 v1(3060,2760) ; 2.12 3360,2935 R0.1
  Bottom Layer w10: TLP_HALL1.13 2850,3000 2825,3025 ; TLP_HALL1.11 2855,3100 2825,3070 2825,3025 ; v1(2940,2885) 2925,2900 TLP_HALL1.15 2845,2900 2825,2920 2825,3025 ; v1(3060,2760) 3480,2760 v1(3530,2810)
  other v1: 3760,2810 3765,2875 4140,3430
H_A: HALL1.2 R37.1 | length 350.1
  Bottom Layer w10: HALL1.2 2041.46,2890 R37.1
H_B: HALL1.3 R39.1 | length 349.1
  Bottom Layer w10: HALL1.3 2027.09,2985 R39.1
H_C: HALL1.4 R41.1 | length 371.3
  Bottom Layer w10: HALL1.4 2269.37,3160.63 R41.1
HALL_A: Core1.27 R30.1 TLP_HALL1.16 | length 1100.3
  Top Layer w10: Core1.27 3630,3255 R30.1
  Bottom Layer w10: TLP_HALL1.16 2935,2850 3027.24,2942.24 3027.24,2972.76 3084.47,3030 3510,3030 3564.65,3084.65 3564.65,3249.65 Core1.27
HALL_B: Core1.28 R38.1 TLP_HALL1.14 | length 1055.2
  Top Layer w10: Core1.28 3610,3345 R38.1
  Bottom Layer w10: TLP_HALL1.14 2930,2950 3030,3050 3482.93,3050 3548.65,3115.72 3548.65,3283.65 Core1.28
HALL_C: Core1.29 R40.1 TLP_HALL1.12 | length 1071.2
  Top Layer w10: Core1.29 3650,3435 R40.1
  Bottom Layer w10: TLP_HALL1.12 2896.81,3045 2950,3045 2990,3085 3495.31,3085 3532.65,3122.35 3532.65,3317.65 Core1.29
IA: QAL1.S R17.1 RA1.2 RIA1.2 | length 1465.9
  Top Layer w10: v1(3000,4175) 3035,4210 R17.1 ; v1(3050,3400) 3084,3366 3106,3366 3120,3380 3120,3405 3092.15,3432.85 3092.15,3626.21 3095.38,3629.44 3095.38,3726.21 3119.17,3750 v1(3159,3750)
  Bottom Layer w10: QAL1.S 2766.5,4140 RA1.2 2965,4140 v1(3000,4175) 3023.61,4151.39 3023.61,4045.55 3036.97,4032.19 3118.42,4032.19 3161,3989.61 3161,3752 v1(3159,3750) ; v1(3050,3400) 3050.2,3399.8 RIA1.2
IA2: Core1.19 LM1.1 RF1.1 | length 2433.2
  Top Layer w10: v1(3520,3391) 3520,3200 3550,3170 v1(3850,3170)
  Bottom Layer w10: LM1.1 3085,3145 3110,3120 3145,3120 3160,3135 3160,3249.15 3175.47,3264.62 3219.62,3264.62 RF1.1 3346,3391 v1(3520,3391) ; v1(3850,3170) 3850,3540 Core1.19@4450,4140
IB: QBL1.S RB1.2 RIB1.2 | length 1030.8
  Top Layer w10: v1(2975,3610) 2975,3435 3060,3350 3375,3350 3390,3365 v1(3390,3370)
  Bottom Layer w10: QBL1.S 2771.5,3760 2886.03,3760 2975,3671.03 v1(2975,3610) ; RIB1.2 3365.2,3345.2 v1(3390,3370)
IB2: Core1.20 LM1.7 RF2.1 | length 1882.7
  Top Layer w10: v1(3440,3155) 3440,3130 v1(3565,3005)
  Bottom Layer w10: LM1.7 3431.81,3155 v1(3440,3155) RF2.1 ; v1(3565,3005) 3565,3062.37 3632.65,3130.03 3632.65,3367.65 Core1.20
IC: QCL1.S RC1.2 RIC1.2 | length 1023.8
  Bottom Layer w10: QCL1.S 2796.5,3380 RC1.2 2795,3290 2795,2865 2870,2790 3005.2,2790 RIC1.2
IC2: Core1.21 LM1.8 RF3.1 | length 2048.8
  Top Layer w10: v1(4390,4035) 4390,4175 Core1.21
  Bottom Layer w10: LM1.8 3385,2880 RF3.1 3754,3149 3858.7,3149 3883.81,3174.12 3883.81,3551.19 4367.63,4035 v1(4390,4035)
ITRIP: ir.9 R17.2 R18.1 | length 1062.9
  Top Layer w10: R17.2 3114.8,4299.8 R18.1 ; R17.2@3115,4225 R18.1 ; v1(3190,4310) 3180,4300 R18.1
  Bottom Layer w10: v1(3190,4310) 3190,4250 3281,4159 3281,3998.39 3397.2,3882.19 3412.93,3882.19 ir.9 3395,3855 3375,3835 3240,3835 v1(3210,3865)
LED1: Core1.15 R35.2 | length 926.7
  Top Layer w10: Core1.15 4544.49,3840.51 R35.2
LED2: Core1.16 R34.2 | length 1173.7
  Top Layer w10: Core1.16 4580,3855 4580,2910 4557.4,2887.4 R34.2
LED3: Core1.17 R23.2 | length 1354.3
  Top Layer w10: v1(4520,3820) 4521,3819 4521,3148.37 4511.84,3139.21 4511.84,2861.19 4544.49,2828.54 R23.2
  Bottom Layer w10: Core1.17 4520,3965 v1(4520,3820)
Net1_1: 1.1 D1.A L1.2 | length 270.9
  Top Layer w10: D1.A 3310,3785 3310,3714.84 1.1 3389.65,3620 L1.2
Net1_3: 1.3 C5.1 R3.2 R5.1 | length 292.7
  Top Layer w10: R5.1 3125,3695 C5.1 3137.24,3707.24 1.3
Net1_4: 1.4 R2.2 | length 108.8
  Top Layer w10: R2.2 3227.6,3507.4 1.4
Net5V_A: 5V.A R33.1
  other v1: 2805,2740
Net6_1: 6.1 R42.2 | length 150.1
  Top Layer w10: R42.2 3195,2559.8 6.1
Net12V_A: 15V.A R31.1
  other v1: 3250,4635
Net24V_A: 24V.A R32.1
  other v1: 2590,4630
NetC1_1: C1.1 TPS1.1 | length 129.9
  Top Layer w20: TPS1.1 2505.67,3214.33 C1.1
NetC1_2: C1.2 D4.K L2.1 TPS1.8 | length 685
  Top Layer w20: D4.K 2383.07,3285 2516.54,3285 ; C1.2 2516.54,3285 ; TPS1.8 2705.67,3205.67 L2.1 2640.67,3285 2516.54,3285
NetC6_2: C6.2 D3.K ir.28 | length 364.4
  Top Layer w10: C6.2 3180,4155 v1(3180,4185) 3180,4220 v1(3140,4260) ; v1(3235,4175) 3247,4163 D3.K
  Bottom Layer w10: ir.28 3135,4255 v1(3140,4260) ; v1(3180,4185) 3190,4175 v1(3235,4175)
NetC10_2: C10.2 D2.K ir.24 | length 265.4
  Top Layer w20: C10.2 3160,4025 v1(3160,4055) ; v1(3230,4055) 3247,4038 D2.K
  Bottom Layer w20: ir.24 v1(3160,4055) v1(3230,4055)
NetC11_2: C11.2 D5.K ir.20 | length 237.5
  Top Layer w10: v1(3140,3835) C11.2 3145,3900 D5.K
  Bottom Layer w10: ir.20 3120,3855 v1(3140,3835)
NetC15_2: C15.2 ir.11 R9.1 | length 507.5
  Top Layer w10: R9.1 3475,3925 3505,3955 ; C15.2 3505,4049.13 3505,3955 ; v1(3520,3765) 3505,3780 3505,3955
  Bottom Layer w10: ir.11 3510,3755 v1(3520,3765)
NetLED_K1: LED.K1 R.2 | length 90.2
  Top Layer w20: v1(4285.2,2450) 4310.2,2475 LED.K1
NetLED_K2: LED.K2 R21.2 | length 84.3
  Top Layer w20: v1(4285.2,2535) 4296.06,2545.87 LED.K2
NetLED_K3: LED.K3 R22.2 | length 81.2
  Top Layer w20: v1(4285.2,2620) 4288.46,2616.73 LED.K3
NetLM1_2: LM1.2 RF1.2 RIA1.1 | length 228.4
  Bottom Layer w10: LM1.2 3136,3202.81 3136,3324 RIA1.1 RF1.2
NetLM1_6: LM1.6 RF2.2 RIB1.1 | length 343.6
  Bottom Layer w10: LM1.6 3335,3260 3360,3285 3485,3285 ; RIB1.1 3485,3285 ; RF2.2 3500,3270 3485,3285
NetLM1_9: LM1.9 RF3.2 RIC1.1 | length 375.9
  Bottom Layer w10: RIC1.1 3130,2830 RF3.2 3335,2855.2 LM1.9
NetQ5_1: Q5.1 R34.1 | length 103.4
  Top Layer w10: R34.1 4667.6,2887.4 v1(4670,2885)
  Bottom Layer w10: Q5.1 4621.69,2885 v1(4670,2885)
NetQ5_3: Q5.3 R21.1 | length 385.7
  Bottom Layer w10: R21.1 4440,2615 4440,2759.29 Q5.3
NetQ6_1: Q6.1 R35.1 | length 99.9
  Top Layer w10: R35.1 v1(4667.4,3047.4) v1@4670,3050
  Bottom Layer w10: Q6.1 v1(4667.4,3047.4)
NetQ6_3: Q6.3 R22.1 | length 460.7
  Bottom Layer w10: R22.1 4360,2839.29 Q6.3
NetQ_1: Q.1 R23.1 | length 93.6
  Top Layer w10: R23.1 4662.4,2727.4 v1(4665,2730)
  Bottom Layer w10: Q.1 4621.89,2730 v1(4665,2730)
NetQ_3: Q.3 R.1 | length 310.7
  Bottom Layer w10: R.1 4530.71,2620.71 Q.3
NetQAH1_G: QAH1.G R6.1 | length 897.9
  Top Layer w10: v1(2330,4390) 2370.24,4349.76 QAH1.G ; v1(3020,4445) 3040,4425 R6.1
  Bottom Layer w10: v1(2330,4390) 2435,4495 2970,4495 v1(3020,4445)
NetQAL1_G: QAL1.G R10.1 | length 1433.2
  Top Layer w10: v1(3120,3445) 3175,3500 v1(3175,3635)
  Bottom Layer w10: QAL1.G 2800.54,4344.76 2816.3,4329 2890.16,4329 3036.97,4182.19 3152.81,4182.19 3265,4070 3265,3920 3246,3901 3216.3,3901 3177,3861.7 3177,3761.7 3180,3758.7 3180,3741.3 3175,3736.3 v1(3175,3635) ; R10.1 3100,3445 v1(3120,3445)
NetQBH1_G: QBH1.G R7.1 | length 1353
  Top Layer w10: v1(2325,4020) 2370.24,3974.76 QBH1.G ; v1(2740,4425) 2805,4490 3110,4490 R7.1
  Bottom Layer w10: v1(2325,4020) 2329.86,4024.86 2589.86,4024.86 2675,4110 2675,4360 v1(2740,4425)
NetQBL1_G: QBL1.G R11.1 | length 978.3
  Top Layer w10: v1(2952.38,3972.38) 2995,3929.76 v1(2995,3810) ; v1(3150,3655) 3151,3656 3183.7,3656 3196,3643.7 3196,3534.67 3192.54,3531.21 3192.54,3492.37 3190,3489.83 v1(3190,3450)
  Bottom Layer w10: QBL1.G 2949.76,3969.76 v1(2952.38,3972.38) v1@2955,3975 ; v1(2995,3810) 3027.19,3777.81 3122.8,3777.81 3136.16,3764.45 3136.16,3668.84 v1(3150,3655) ; v1(3190,3450) 3225,3485 R11.1
NetQCH1_G: QCH1.G R8.1 | length 1785.3
  Top Layer w10: QCH1.G 2470,3686.02 v1(2470,4425)
  Bottom Layer w10: v1(2470,4425) 2510,4465 2950,4465 3020,4395 v1(3370,4395)
NetQCL1_G: QCL1.G R16.1 | length 784.7
  Bottom Layer w10: QCL1.G 2932.02,3424 3128.7,3424 3129.7,3425 3360,3425 3400,3465 R16.1
NetR1_1: R1.1 R4.2 TPS1.4 | length 221.5
  Top Layer w20: TPS1.4 2421.34,2886.54 R4.2 R1.1
NetR37_2: R37.2 TLP_HALL1.2 | length 237.5
  Bottom Layer w10: R37.2 2424.8,2900 TLP_HALL1.2
NetR39_2: R39.2 TLP_HALL1.4 | length 238.7
  Bottom Layer w20: R39.2 2424.8,2980 2570,2980 2590,3000 TLP_HALL1.4
NetR41_2: R41.2 TLP_HALL1.6 | length 259.5
  Bottom Layer w10: R41.2 2445,3085 2490,3130 2560,3130 2590,3100 TLP_HALL1.6
PGND: 1.2 5V.K 15V.K 24V.K C2.2 C3.2 C4.1 C7.1 C8.1 C9.1 C12.1 C13.2 C14.2 C15.1 CV2.2 CV.2 D4.A HALL1.5 ir.12 ir.13 LM1.3 LM1.5 LM1.10 LM1.11 POWER1.2 R0.2 R4.1 R5.2 R18.2 R24.1 R25.1 R26.1 RA1.1 RB1.1 RC1.1 TPS1.6 TPS1.9
  other v1: 3290,2865 3020,2890 3445,3195 2850,3305 3150,3395 3400,3420 2849.13,3470 1975,3525 3025,3550 3150,3555 2845,3560 1915,3575 2030,3575 2885,3685 3210,3755 3280,3755 1920,3825 2855,3830 3200,3835 2855,3885 2855,3930 1920,3980 1920,4095 1920,4165 2860,4210 1920,4230 3245,4250 2855,4255 3035,4295 2185,4300 2855,4300 3355,4330 3405,4330 2295,4340 1915,4440 3180,4490 2995,4560 3095,4560 3175,4560 2910,4570 2465,4610 2105,4615 2760,4640 2325,4660
  other v2: 2504.02,3011.69 2547.32,3011.69 2504.02,3055 2547.32,3055 2504.02,3098.31 2547.32,3098.31
RXD: Core1.13 USART1.4 | length 2062.1
  Top Layer w10: USART1.4 3579.37,2620 3937.4,2620 4145.48,2828.09 4178.09,2828.09 4505,3155 4505,3780 Core1.13
TXD: Core1.12 USART1.3 | length 1917.2
  Top Layer w10: USART1.3 3682.91,2570 v1(4020,2570)
  Bottom Layer w10: v1(4020,2570) 4505,3055 4505,3730 Core1.12
VA: 2.5 C13.1 R12.2 R13.1 R26.2 | length 1513.3
  Top Layer w10: R12.2 R26.2 2929.8,4120.2 R13.1 v1(2975,4075) ; v1(2975,3705) 2975,3639.7 2954,3618.7 2954,3496.83 2955,3495.83 2955,3355 3130,3180 3235,3180 3260,3205 2.5
  Bottom Layer w10: v1(2975,3705) 2974,3706 2974,4074 v1(2975,4075)
VB: 2.7 C12.2 R14.2 R15.1 R24.2 | length 983.9
  Top Layer w10: C12.2 C12.2@2929.8,3826.06 ; R14.2 R24.2 C12.2@2929.8,3826.06 ; R15.1 2929.8,3730.2 C12.2@2929.8,3826.06 ; v1(3085,3395) 2996,3484 2996,3719 2929.8,3785.2 C12.2@2929.8,3826.06 ; v1(3115,3275) 3128.19,3261.81 2.7
  Bottom Layer w10: v1(3085,3395) 3085,3305 v1(3115,3275)
VC: 2.9 C14.1 R19.2 R20.1 R25.2 | length 874.8
  Top Layer w10: R19.2@2919.8,3650 R25.2 2919.8,3380.2 R20.1 2916.76,3376.76 2916.76,3148.24 2970,3095 3175,3095 3210,3060 2.9
VCOM: 2.4 2.6 2.8 R13.2 R15.2 R20.2 | length 2144.2
  Top Layer w10: R15.2 2795,3669.8 ; R13.2 2795,4059.8 2795,3669.8 ; 2.6 3210,3300 3240,3330 3295,3330 3310,3315 2.4 3310,3185 3237,3112 3237,2967 3215,2945 3185,2945 3160,2970 2.8 3152.98,3025.21 2979.79,3025.21 2895,3110 2895,3330.2 R20.2 2795,3430.2 2795,3669.8
pads on no net: 2.10 2.11 2.13 Core1.3 Core1.9 Core1.10 Core1.11 Core1.14 Core1.18 Core1.22 Core1.23 Core1.24 Core1.25 Core1.26 Core1.30 Core1.31 Core1.32 Core1.33 Core1.34 Core1.35 Core1.37 Core1.43 Core1.44 Core1.45 Core1.46 Core1.50 ir.17 ir.21 ir.25 LM1.12 LM1.13 LM1.14 TJA1.5 TLP_HALL1.7 TLP_HALL1.8 TLP_HALL1.9 TLP_HALL1.10 TPS1.2 TPS1.3 TPS1.5 U1.4

## Polygon pours and split planes (outlines as drawn)
GND on Bottom Layer "Bottom Layer-No Net" (solid, remove dead copper, pour order 6): 3400,3013.4 3545,3185.95 3545,3507.25 3545,4953.1 3555,4965 3590,4923.35 4805,4923.35 4805,2055.45 4860,1990 4840,2013.8 3325,2013.8
PGND on Bottom Layer "Bottom Layer-No Net" (solid, remove dead copper, pour order 7): 1535,4995 5495,4995 5590,4900 5260,4570 5260,1700 1570,1700 1415,1855
GND on Top Layer "Bottom Layer-No Net" (solid, remove dead copper, pour order 5): 3401.22,3066.35 3546.22,3227.58 3546.22,3527.82 3546.22,4878.88 3556.22,4890 3591.22,4851.08 4806.22,4851.08 4806.22,2171.2 4861.22,2110.04 4841.22,2132.28 3326.22,2132.28
PGND on Top Layer "Bottom Layer-No Net" (solid, remove dead copper, pour order 8): 1535,5000 1545,4990 5785,4990 5785,3210 4855,2280 4810,2235 1680,2235

## Keep-outs
Keep-Out Layer:
  lines w10: 1875,2515 ccw(c2000,2510) 1995,2385 4560,2385 ; 1875,2520 1875,4585 cw(c2000,4580) 2005,4705 4575,4705 cw(c4570,4580) 4695,4575 4695,2505 cw(c4570,2510) 4565,2385

## Silkscreen, mask and mechanical layers (free items; w line width, h text height)
Top Overlay:
  lines w10: 2125,4595 2175,4595 ; 2150,4570 2150,4620 ; 2735,4590 2735,4670 ; 2845,4570 2895,4570 ; 2870,4545 2870,4600 ; 3390,4595 3390,4680 ; 3765,3965 3905,3965 ; 3765,4205 3905,4205 ; 3905,3800 4025,3800 4025,4390 3905,4390 ; 3905,3930 4025,3930 ; 3905,4060 4025,4060 ; 3905,4255 4020,4255 4025,4260 ; 3765,3725 3765,4460 3905,4460 3905,3725 3765,3725
  text "24V" at 2135,4420 h40 r270
  text "R12" at 3795,4400 h35
  text "A" at 4055,4345 h150
  text "R26" at 3795,4340 h35
  text "R18" at 3925,4340 h35
  text "PGND" at 2135,4285 h40 r270
  text "C13" at 3795,4280 h35
  text "R17" at 3925,4274.38 h35
  text "R13" at 3795,4220 h35
  text "C6" at 3925,4208.75 h35
  text "R14" at 3795,4160 h35
  text "C10" at 3925,4143.12 h35
  text "R24" at 3795,4100 h35
  text "C11" at 3925,4077.5 h35
  text "C12" at 3795,4040 h35
  text "C8" at 3925,4011.88 h35
  text "A" at 2125,4000 h40 r270
  text "R15" at 3795,3980 h35
  text "C5" at 3925,3946.25 h35
  text "R19" at 3795,3920 h35
  text "R3" at 3925,3880.62 h35
  text "R25" at 3795,3860 h35
  text "B" at 2125,3845 h40 r270
  text "R5" at 3925,3815 h35
  text "C14" at 3795,3800 h35
  text "C" at 2120,3765 h40 r270
  text "R20" at 3795,3740 h35
  text "PGND" at 2135,3390 h40 r270
  text "3V3" at 4515,3255 h40
  text "C" at 2135,3185 h40 r270
  text "B" at 2135,3025 h40 r270
  text "A" at 2135,2875 h40 r270
  text "5V" at 2130,2740 h40 r270
  text "H" at 2530,2590 h40
  text "L" at 2685,2590 h40
  text "H" at 2835,2590 h40
  text "L" at 2370,2585 h40
  text "GND" at 3685,2585 h40
  text "3V3" at 3845,2585 h40
  text "RX" at 3395,2580 h40
  text "TX" at 3550,2580 h40
Top Solder:
  lines w100: 2000,4375 2015,4375 2140,4500 2545,4500 2660,4385 ; 2005,3750.83 2005,3750 2315,3440 2400,3440 2405,3435 ; 2005,4057.91 2152.91,4057.91 2270,4175 2390,4175 2395,4170 ; 2290.63,3904.37 2005,3904.37 2295.63,3904.37 2395,3805 ; 2645,4145 2645,3990 2640,3985 2640,3630 2665,3605
Bottom Solder:
  lines w100: 2005,3750.83 2009.17,3750.83 2009.17,3745.83 2230,3525 2390,3525 2400,3535 ; 2152.91,4057.91 2005,4057.91 2142.91,4057.91 2350,4265 ; 2290.63,3904.37 2005,3904.37 2395.63,3904.37 2405,3895 ; 2405,4175 2410,4180

## Text inside footprints (layer, text, board x,y; h text height)
Core1: Top Overlay "LCD" at 4555,4155 h35 r90; Top Overlay "P1" at 4395,3200 h35 r90; Top Overlay "STM32F103" at 3890,3625 h35
U1: Top Overlay "LM1117" at 4020.87,2912.87 h35 r180